# Allegro board B07_OSC.brd
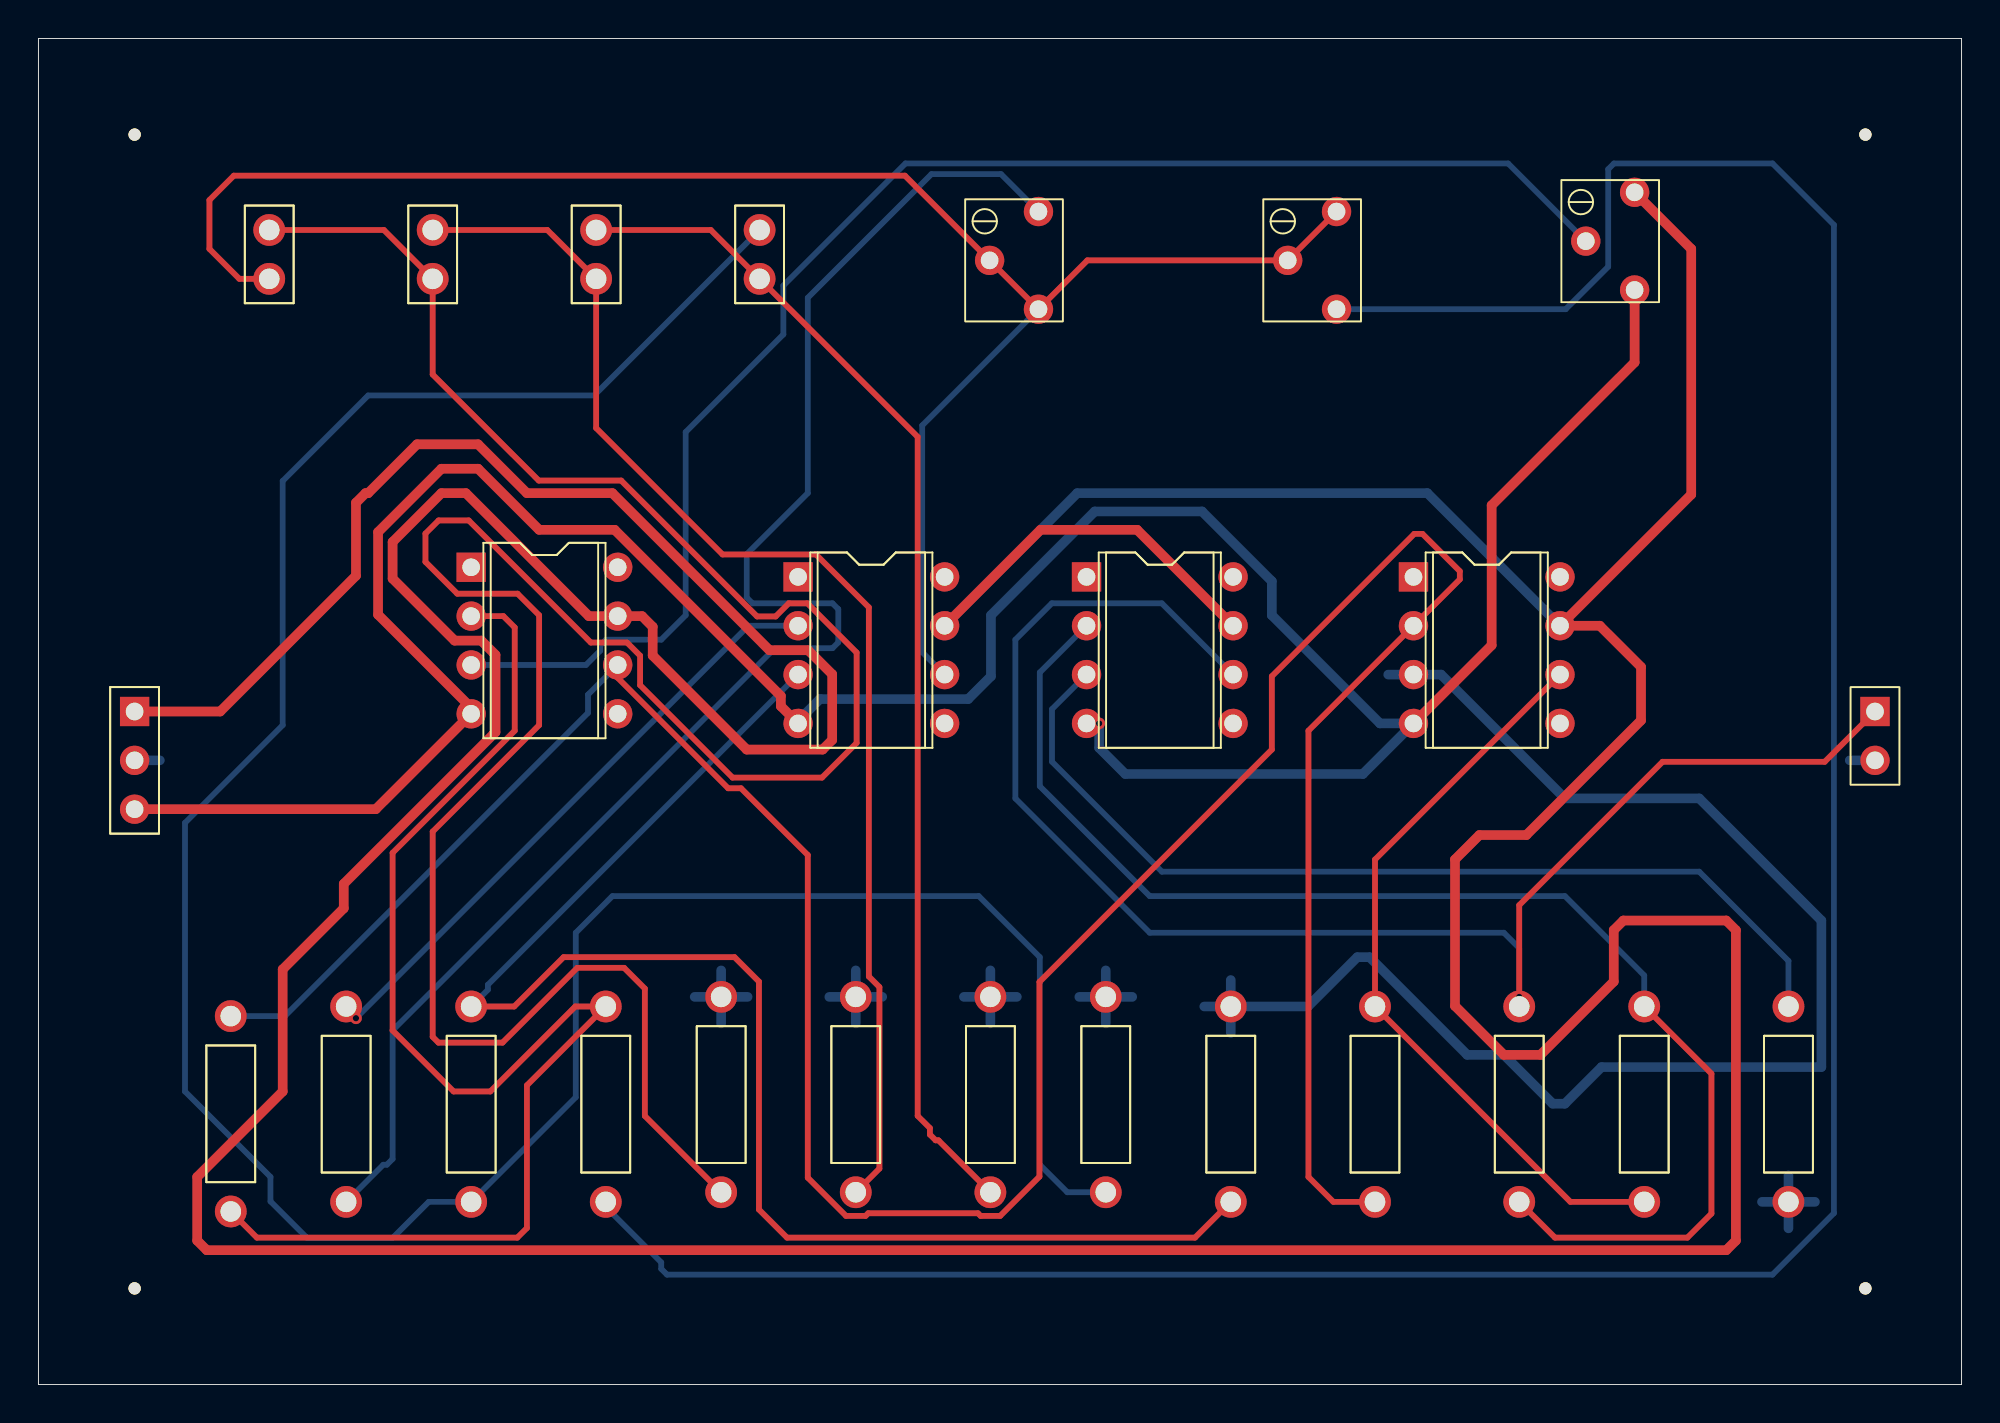
[diagram p0: board, top side]
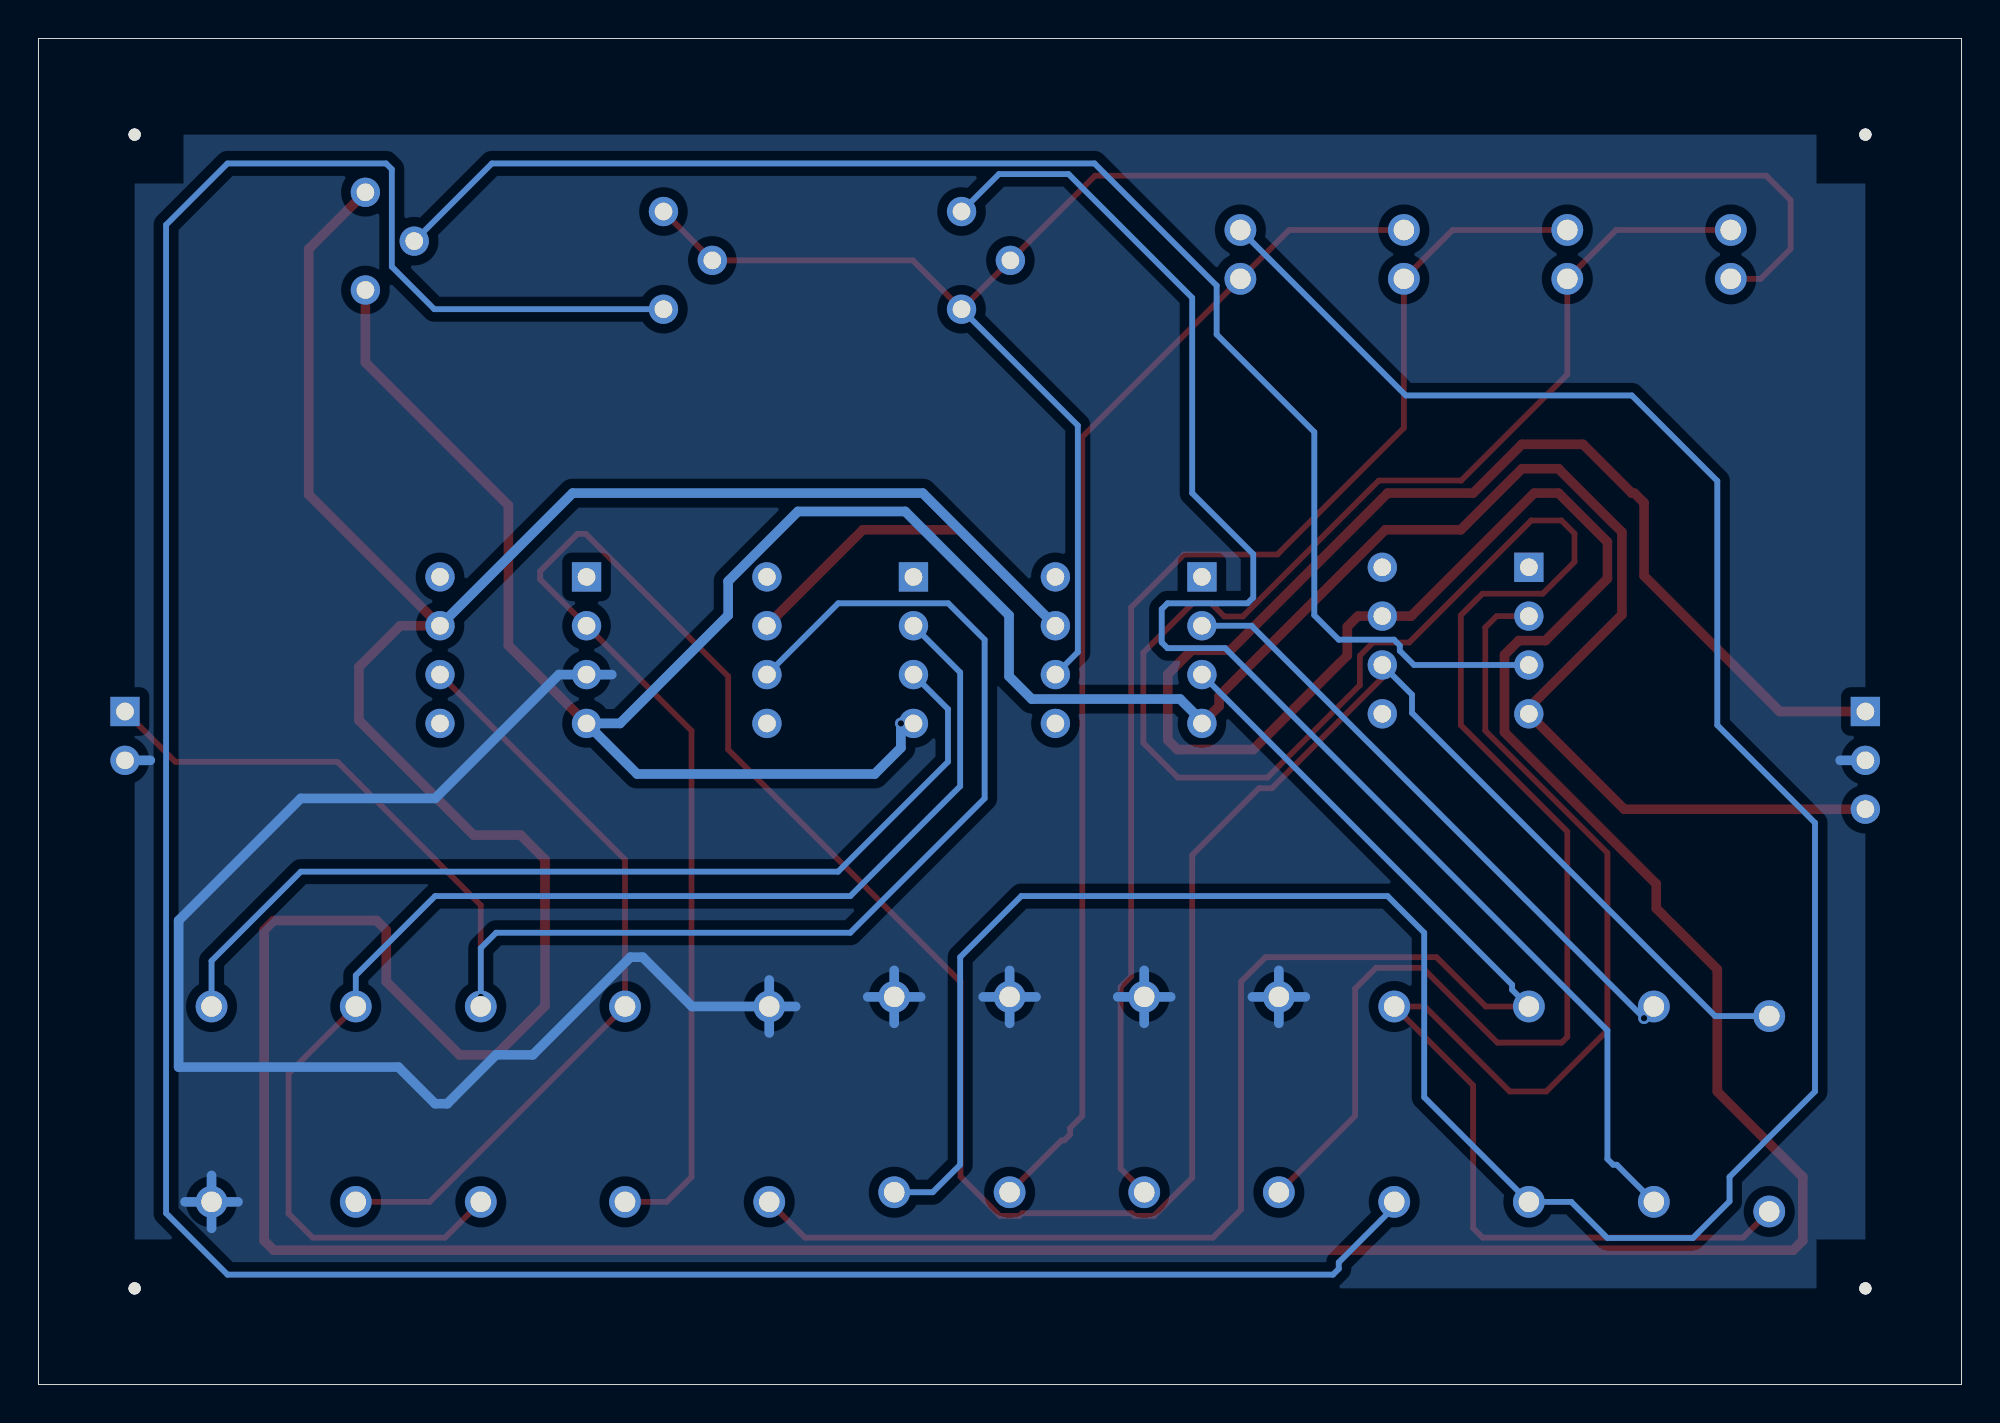
[diagram p1: board, bottom side, seen from below]

Outline 100 x 70 mm; copper layers: TOP, BOTTOM. Coordinates in mm from the lower left corner of the outline.
Outline path: 0,70 0,0 100,0 100,70 0,70

## Design rules (mm)
constraint set DEFAULT: min track width 0.3
nets with their own width: min track width 0.5; nets +12V -12V GND

## Placement (name value [footprint] x y rotation side)
C1  0.001uF  [CAPCK05]  12 57.5 0 top
C2  0.001uF  [CAPCK05]  20.5 57.5 0 top
C3  0.001uF  [CAPCK05]  29 57.5 0 top
C4  0.001uF  [CAPCK05]  37.5 57.5 0 top
J1  CON3  [JUMPER3]  5 35 270 top
J2  CON2  [JUMPER2]  95.5 35 270 top
NOREF  -  [unnamed]  95 5 0 top
NOREF#2  -  [#2]  95 5 90 top
NOREF#3  -  [#2]  0 65.07 0 top
NOREF#4  -  [#2]  5 5 90 top
NOREF#5  -  [#2]  95 65 0 top
NOREF#6  -  [unnamed]  5 65 0 top
NOREF#7  -  [unnamed]  5 5 0 top
NOREF#8  -  [unnamed]  95 65 0 top
NOREF#9  -  [#2]  0 56.3 0 top
NOREF#10  -  [#2]  5 35 90 top
NOREF#11  -  [#2]  94.25 0 90 top
NOREF#12  -  [#2]  4.37 0 90 top
NOREF#13  -  [#2]  5 65 90 top
NOREF#14  -  [#2]  4.24 0 90 top
NOREF#15  -  [#2]  5 65 0 top
R1  10K  [RES400]  10 9 0 top
R2  15K  [RES400]  16 9.5 0 top
R3  10K  [RES400]  22.5 9.5 0 top
R4  20K  [RES400]  29.5 9.5 0 top
R5  4.7K  [RES400]  35.5 10 0 top
R6  4.7K  [RES400]  42.5 10 0 top
R7  4.7K  [RES400]  49.5 10 0 top
R8  4.7K  [RES400]  55.5 10 0 top
R9  1K  [RES400]  62 9.5 0 top
R10  8.2K  [RES400]  69.5 9.5 0 top
R11  10K  [RES400]  77 9.5 0 top
R12  2.2K  [RES400]  83.5 9.5 0 top
R13  5.1K  [RES400]  91 9.5 0 top
U1  LF356  [DIP8_3]  71.5 42 0 top
U2  LF356  [DIP8_3]  54.5 42 0 top
U3  LF356  [DIP8_3]  39.5 42 0 top
U4  LF356  [DIP8_3]  22.5 42.5 0 top
VR1  470K  [RESADJ]  52 61 0 top
VR2  100K  [RESADJ]  67.5 61 0 top
VR3  10K  [RESADJ]  83 62 0 top

## Library data of the parts
C1-C4 = CAP NP: Tolerance: ***; User Part Number: ***
J1 = CON3: User Part Number: ***
J2 = CON2: User Part Number: ***
R1-R13 = R: Tolerance: ***; User Part Number: ***
U1-U4 = LF356_1: Tolerance: ***; User Part Number: ***
VR1-VR3 = RESISTOR VAR: Tolerance: ***; User Part Number: ***

## Footprints (pads in the part's own frame, mm; a bottom-side part is the same pattern mirrored in y, then rotated)
CAPCK05
  round 1.651 hole 1.067: 1(0,0) 2(0,2.54)
DIP8_3
  rect 1.524x1.524 hole 0.914: 1(0,0)
  round 1.524 hole 0.914: 2(0,-2.54) 3(0,-5.08) 4(0,-7.62) 5(7.62,-7.62) 6(7.62,-5.08) 7(7.62,-2.54) 8(7.62,0)
JUMPER2
  rect 1.524x1.524 hole 0.914: 1(0,0)
  round 1.524 hole 0.914: 2(2.54,0)
JUMPER3
  rect 1.524x1.524 hole 0.914: 1(0,0)
  round 1.524 hole 0.914: 2(2.54,0) 3(5.08,0)
RES400
  round 1.651 hole 1.067: 1(0,0) 2(0,10.16)
RESADJ
  round 1.524 hole 0.914: 1(0,0) 2(-2.54,-2.54) 3(0,-5.08)
unnamed
  round 0.635 hole 3 unplated: (0,0)

## Nets
+12V: J1.1 U1.7 U2.7 U3.7 U4.7 VR3.1
-12V: J1.3 U1.4(V-) U2.4(V-) U3.4(V-) U4.4(V-) VR3.3
GND: J1.2 J2.2 R5.2 R6.2 R7.2 R8.2 R9.2 R13.1 U1.3
OUT: J2.1 R11.2 U2.6
SIG: R1.2 R10.1 U1.2 U4.6
N00391: C1.1 U3.6 VR1.2(WIPER) VR1.3 VR2.1 VR2.2(WIPER)
N00441: R2.1 VR1.1
N00445: R2.2 U3.2
N00452: R3.2 R9.1 U3.3
N00459: C1.2 C2.1 R5.1
N00579: C2.2 C3.1 R6.1
N00583: C3.2 C4.1 R7.1
N00820: R4.1 VR2.3
N00824: R1.1 R4.2 U4.2
N00874: U4.3 VR3.2(WIPER)
N01492: R10.2 R12.1 U1.6
N01603: R13.2 U2.3
N01644: R11.1 R12.2 U2.2
N03817: C4.2 R3.1 R8.1

Pads without a net: U1 1 5 8; U2 1 5 8; U3 1 5 8; U4 1 5 8

## Via types
v1: diameter 0.61, hole 0.33, TOP to BOTTOM, 19 vias

## Routing (per net, layer and track width the routed paths; a pad name or vN(x,y) marks a point on that pad's centre or on a via; arc(x,y) is an arc through that point)
+12V: length 357.4
  TOP w0.5: U3.7 52.11,44.45 57.13,44.45 v1(62.12,39.46) ; VR3.1 85.94,59.05 85.94,46.28 U1.7 81.19,39.46 83.33,37.32 83.33,34.54 77.37,28.57 74.93,28.57 73.66,27.3 73.66,19.68 76.2,17.14 78.11,17.14 81.92,20.95 81.92,23.63 82.42,24.13 87.77,24.13 88.27,23.63 88.27,7.49 87.77,6.99 8.76,6.99 8.26,7.49 8.26,10.79 12.7,15.24 12.7,21.59 15.88,24.77 15.88,26.04 23.77,33.93 23.77,37.94 23.02,38.69 21.64,38.69 18.41,41.91 18.41,43.81 20.95,46.35 22.23,46.35 28.62,39.96 v1(30.12,39.96) 31.39,39.96 31.94,39.41 31.94,37.91 36.83,33.02 40.77,33.02 41.27,33.52 41.27,36.94 40.02,38.19 38.01,38.19 29.84,46.35 25.4,46.35 22.86,48.9 19.68,48.9 17.14,46.35 17.01,46.35 16.51,45.85 16.51,42.06 9.45,35 v1(5,35) v1(5,35)
  BOTTOM w0.5: U1.7 72.22,46.35 54.02,46.35 U3.7 ; v1(5,35) v1(5,35)
-12V: length 152
  TOP w0.5: U4.4 17.54,29.92 J1.3 ; v1(39.37,34.38) U3.4 38.6,35.28 38.6,35.81 29.96,44.45 26.04,44.45 22.86,47.62 20.95,47.62 17.66,44.33 17.66,40.03 v1(22.82,34.88) ; U2.4 v1(55.16,34.38) ; U1.4 75.56,38.45 75.56,45.72 83,53.16 v1(83,56.92)
  BOTTOM w0.5: v1(39.37,34.38) 40.64,35.65 48.35,35.65 49.53,36.83 49.53,40.01 54.93,45.4 60.51,45.4 64.14,41.78 64.14,40.01 69.76,34.38 U1.4 68.87,31.75 56.52,31.75 55.16,33.11 v1(55.16,34.38) ; U4.4 v1(22.82,34.88)
GND: length 105.4
  BOTTOM w0.5: R7.2 50.88,20.16 ; R7.2 49.5,18.78 ; R7.2 48.12,20.16 ; R7.2 49.5,21.54 ; R9.2 62,21.04 ; R9.2 66.02,19.66 68.58,22.23 69.22,22.23 74.3,17.14 76.2,17.14 78.74,14.61 79.38,14.61 81.28,16.51 92.71,16.51 92.71,24.13 86.36,30.48 79.38,30.48 72.94,36.92 U1.3 70.19,36.92 ; R9.2 62,18.28 ; R9.2 60.62,19.66 ; 55.5,18.78 R8.2 ; R8.2 55.5,21.54 ; R8.2 54.12,20.16 ; R8.2 56.88,20.16 ; 89.62,9.5 R13.1 ; R13.1 91,10.88 ; R13.1 92.38,9.5 ; R13.1 91,8.12 ; 35.5,18.78 R5.2 ; R5.2 36.88,20.16 ; R5.2 34.12,20.16 ; R5.2 35.5,21.54 ; 41.12,20.16 R6.2 ; R6.2 42.5,18.78 ; R6.2 43.88,20.16 ; R6.2 42.5,21.54 ; J1.2 6.31,32.46 ; 94.19,32.46 J2.2
OUT: length 82.3
  TOP w0.3: v1(77,19.66) v1(77,20.16) 77,24.93 84.45,32.38 92.89,32.38 J2.1
  BOTTOM w0.3: v1(77,19.66) v1(77,20.16) 77,22.7 76.2,23.5 57.78,23.5 50.8,30.48 50.8,38.73 52.69,40.63 58.41,40.63 U2.6
SIG: length 156.6
  TOP w0.3: U4.6 30.12,36.75 35.86,31.01 36.53,31.01 40.01,27.54 40.01,10.76 41.99,8.77 43.01,8.77 43.15,8.91 48.85,8.91 48.99,8.77 50.01,8.77 52.05,10.81 52.05,20.94 64.14,33.02 64.14,36.83 71.54,44.24 71.97,44.24 73.91,42.29 73.91,41.87 U1.2 66.04,34 66.04,10.79 67.33,9.5 R10.1
  BOTTOM w0.3: R1.2 12.81,19.16 28.57,34.92 28.57,35.88 U4.6
N00391: length 92.4
  TOP w0.3: C1.1 10.45,57.5 8.89,59.05 8.89,61.59 10.16,62.87 45.05,62.87 VR1.2 VR1.3 54.54,58.46 VR2.2 VR2.1
  BOTTOM w0.3: U3.6 45.95,38.09 45.95,49.87 VR1.3
N00441: length 80.7
  BOTTOM w0.3: R2.1 17.93,11.43 18.11,11.43 18.41,11.73 18.41,18.42 38.29,38.29 41.29,38.29 41.59,38.59 41.59,40.32 41.29,40.63 37.13,40.63 36.83,40.93 36.83,43.18 40.01,46.35 40.01,56.52 46.44,62.95 50.05,62.95 VR1.1
N00445: length 32.3
  TOP w0.3: v1(16.51,19.05) 16,19.56 R2.2
  BOTTOM w0.3: v1(16.51,19.05) 36.92,39.46 U3.2
N00452: length 78.6
  TOP w0.3: R3.2 24.74,19.66 27.3,22.23 36.2,22.23 37.47,20.95 37.47,9.1 38.93,7.64 60.14,7.64 R9.1
  BOTTOM w0.3: U3.3 23.37,20.79 23.37,20.53 R3.2
N00459: length 135.9
  TOP w0.3: C1.2 17.96,60.04 v1(20.5,57.5) 20.5,52.52 26.02,47.01 30.3,47.01 37.37,39.94 38.33,39.94 39.02,40.63 39.98,40.63 42.55,38.06 42.55,33.37 40.74,31.56 36.09,31.56 31.29,36.37 31.29,37.9 30.6,38.59 28.72,38.59 22.37,44.94 20.81,44.94 20.12,44.25 20.12,42.78 21.78,41.13 24.91,41.13 26.04,40 26.04,34.29 20.5,28.75 20.5,18.08 20.8,17.78 24.13,17.78 28.02,21.67 30.45,21.67 31.53,20.59 31.53,13.97 R5.1
N00579: length 66.5
  TOP w0.3: R6.1 43.73,11.23 43.73,20.67 43.18,21.22 43.18,40.42 40.43,43.17 35.57,43.17 29,49.74 C3.1 26.46,60.04 C2.2
N00583: length 62.1
  TOP w0.3: v1(49.5,10) 46.8,12.7 46.66,12.7 46.35,13 46.35,13.34 45.72,13.97 45.72,49.28 C4.1 34.96,60.04 C3.2
N00820: length 151.8
  TOP w0.3: R4.1 v1(29.5,9.23)
  BOTTOM w0.3: v1(29.5,9.23) 32.38,6.35 32.38,6.01 32.69,5.71 90.17,5.71 93.36,8.91 93.36,60.31 90.17,63.5 81.93,63.5 81.63,63.2 81.63,58.13 79.42,55.92 VR2.3
N00824: length 69.7
  TOP w0.3: R1.1 11.36,7.64 24.9,7.64 25.4,8.14 25.4,15.56 v1(29.5,19.66) 27.91,19.66 23.5,15.24 21.59,15.24 18.41,18.41 18.41,27.65 24.77,34 24.77,39.37 24.18,39.96 U4.2
N00874: length 77.7
  BOTTOM w0.3: U4.3 28.47,37.42 29.21,38.16 29.21,38.44 29.51,38.73 32.38,38.73 33.66,40.01 33.66,49.53 38.73,54.61 38.73,57.15 45.09,63.5 76.42,63.5 VR3.2
N01492: length 39.5
  TOP w0.3: U1.6 69.5,27.3 R10.2 79.66,9.5 R12.1
N01603: length 50.2
  BOTTOM w0.3: R13.2 91,22.03 86.36,26.67 58.42,26.67 52.7,32.38 52.7,35.12 U2.3
N01644: length 70
  TOP w0.3: R11.1 78.86,7.64 85.74,7.64 87,8.89 87,16.16 R12.2
  BOTTOM w0.3: R12.2 83.5,21.27 79.38,25.4 57.78,25.4 52.07,31.11 52.07,37.03 U2.2
N03817: length 141.3
  TOP w0.3: C4.2 v1(37.12,60.04)
  BOTTOM w0.3: R8.1 53.5,10 52.07,11.43 52.07,22.23 48.9,25.4 29.84,25.4 27.94,23.5 27.94,14.94 v1(22.5,9.5) 20.3,9.5 18.41,7.62 13.97,7.62 12.06,9.53 12.06,10.79 7.62,15.24 7.62,29.21 12.7,34.29 12.7,46.99 17.14,51.44 28.89,51.44 C4.2

## Copper pours and planes (outline as drawn; the poured copper is in the pictures)
GND on BOTTOM: 95,5 95,65 5,65 5,5 ; 12 cut-outs

## Text on the board
DIMENSION: CHOPPING WAVE OSC | ELECTRONIC CAD
COMPVAL_TYPE_TOP: FIGURE | FINISHED_SIZE | 0.3302 | 0.9144 | 1.0668 | 3.0 | DRILL CHART: TOP to BOTTOM | ALL UNITS ARE IN MILLIMETERS | PLATED | NON-PLATED | QTY | 19 | 46 | 34 | 4
